# Altium PCB PCB_test_2026-06-06.pcbdoc
Units mm, origin at the board's own origin, x right, y up, seen from the top; angles counter-clockwise.
Board outline 102.65 x 77.65 mm, 2 copper layers (Top Layer, Bottom Layer); 1 components, 5 nets, 2 pads, 0 vias.
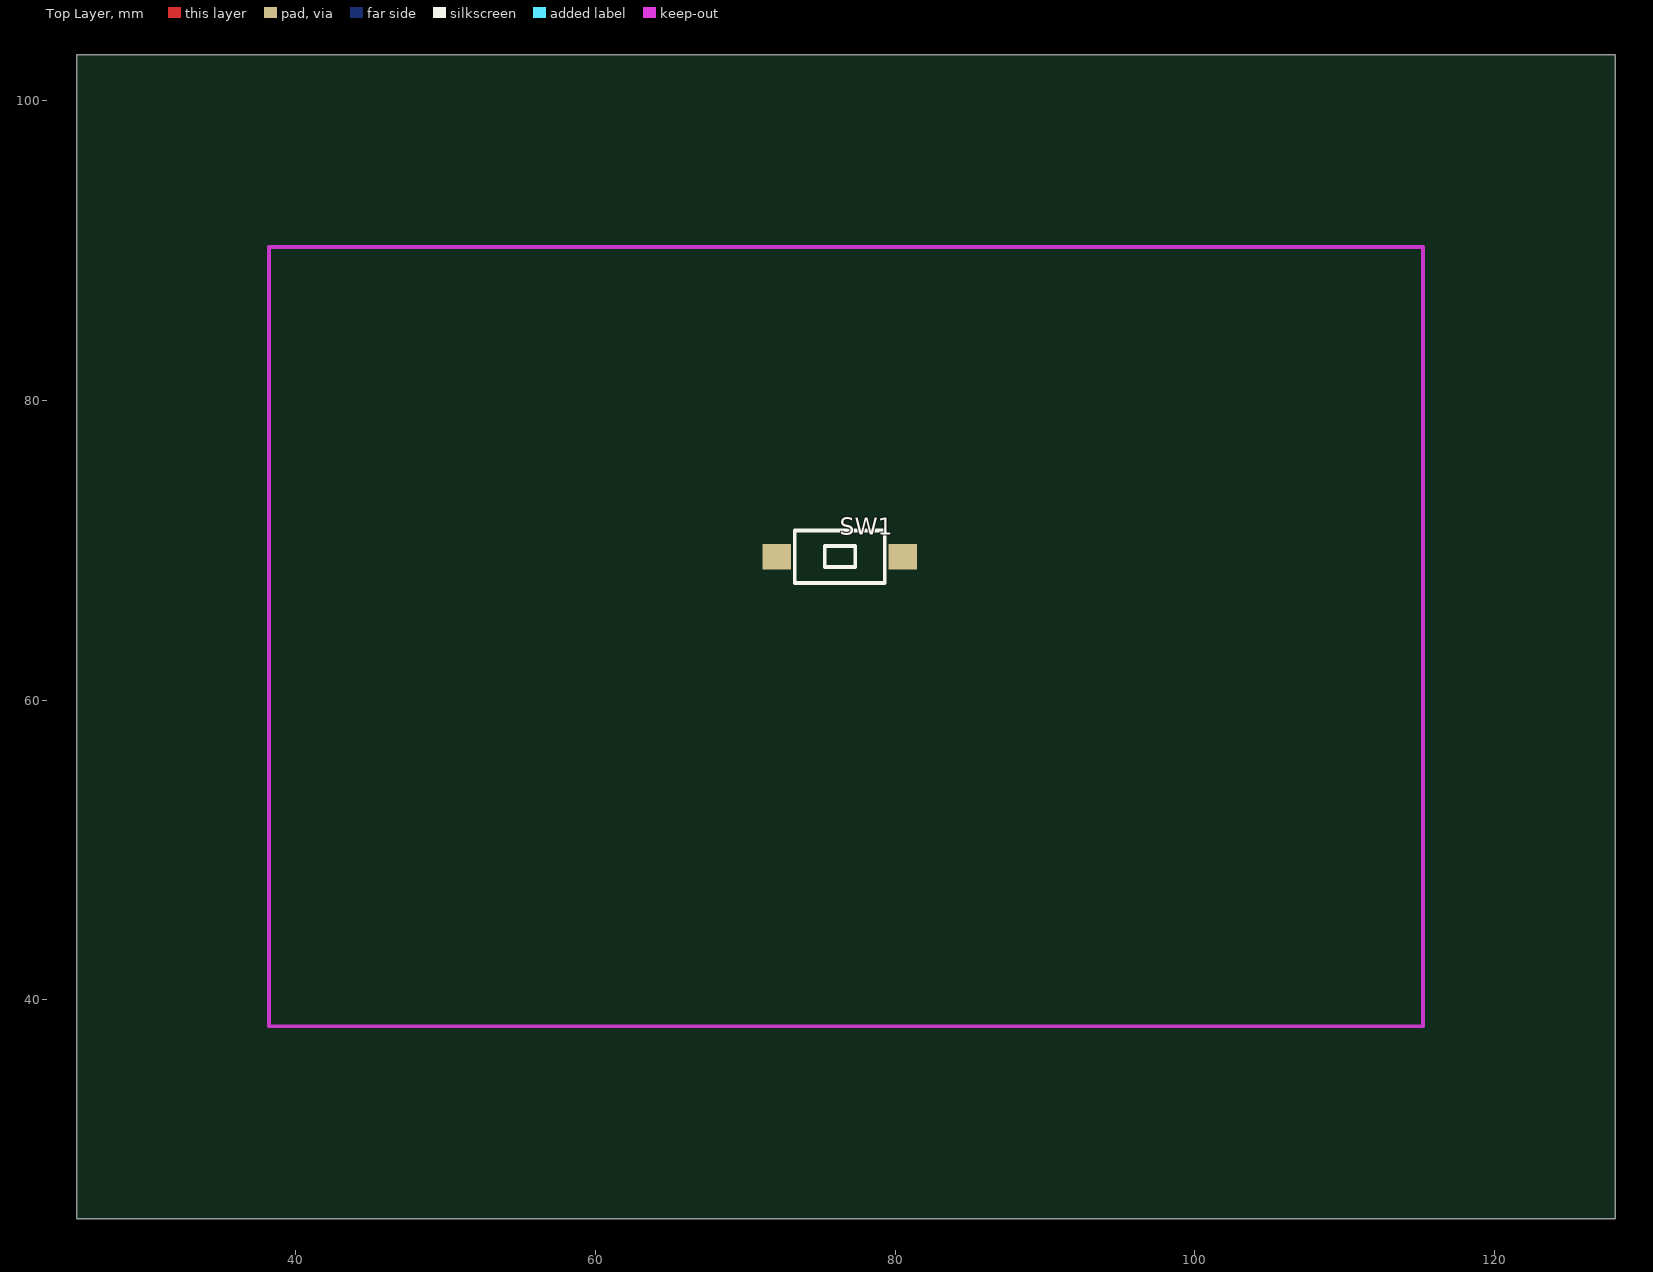
[diagram p0: Top Layer view]
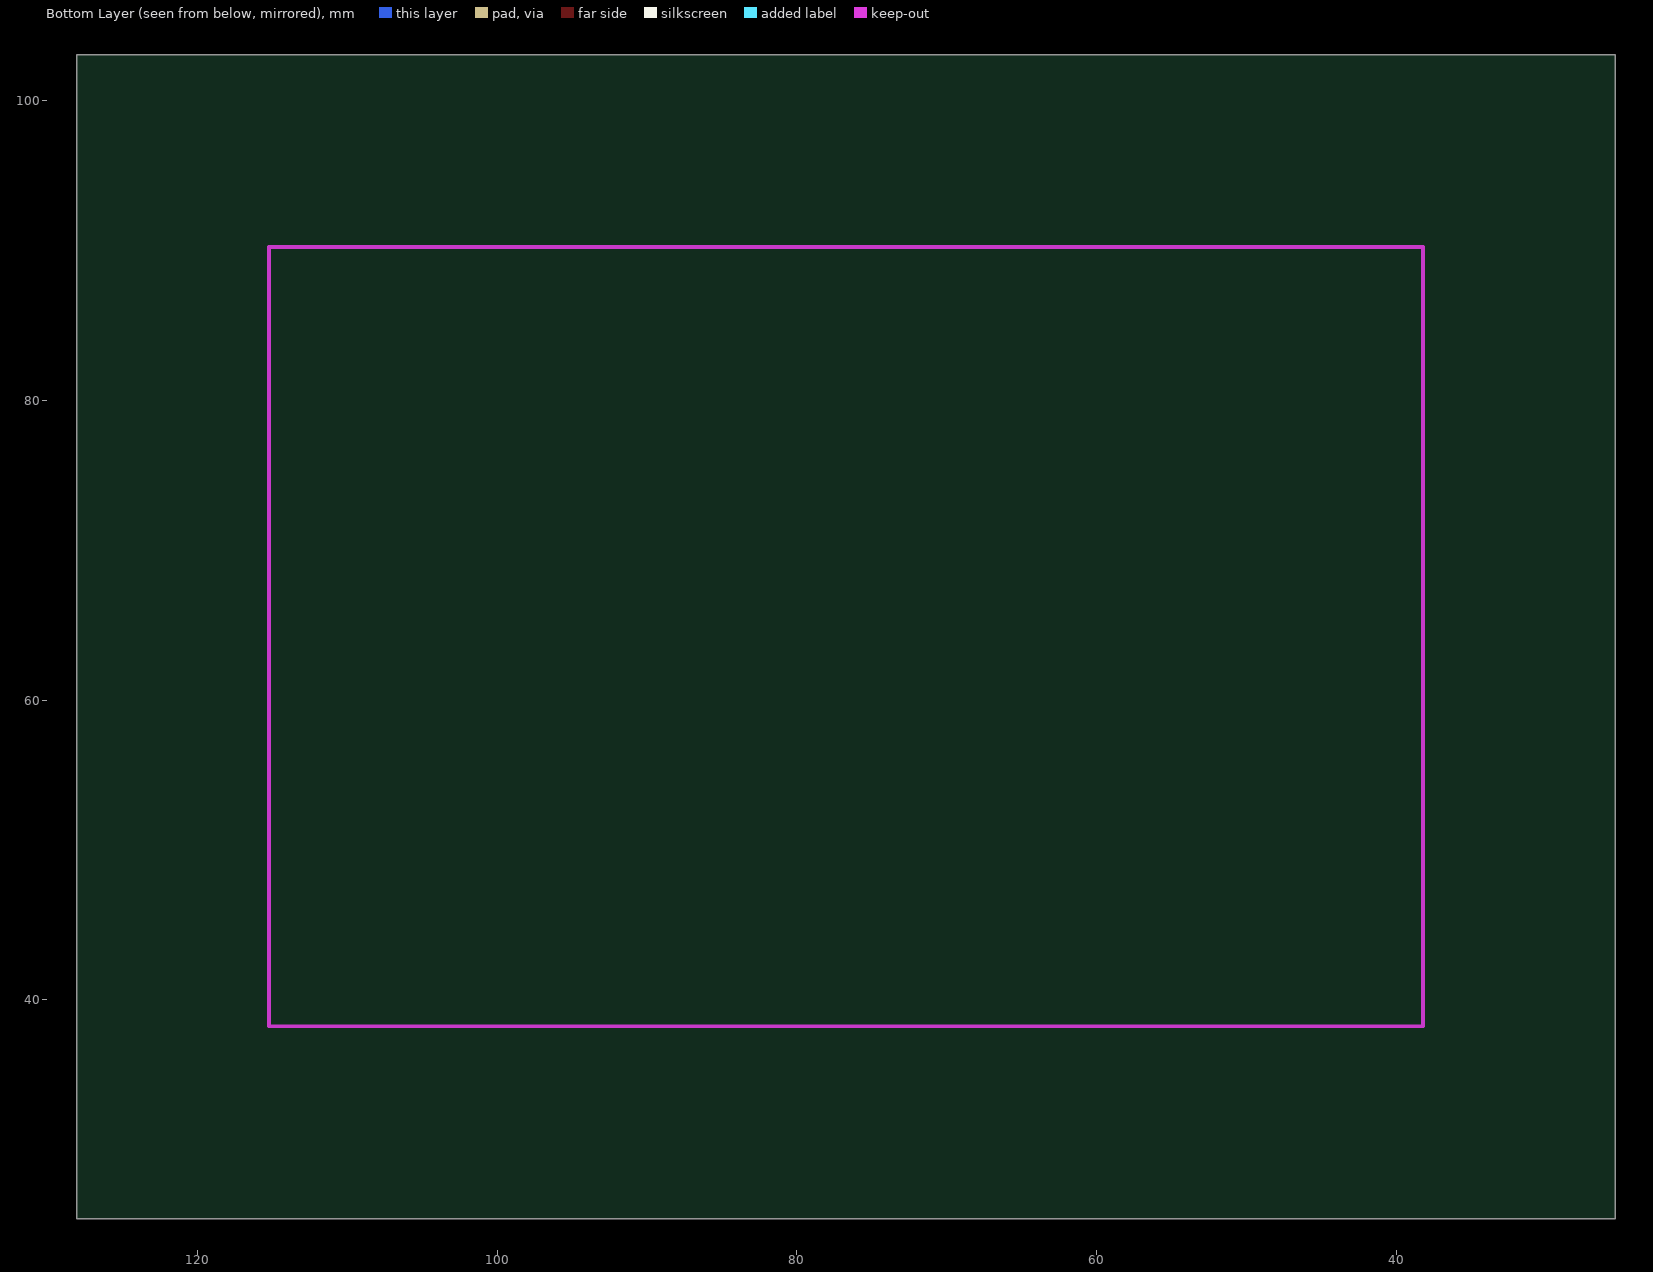
[diagram p1: Bottom Layer view, seen from below]

## Layer stack, top to bottom
Top Layer: signal copper (thickness not stored)
Dielectric: dielectric 0.32, FR-4, Dk 4.8
Bottom Layer: signal copper (thickness not stored)

## Board outline
128.054,25.4 25.4,25.4 25.4,103.054 128.054,103.054

## Components (designator, comment, footprint, x,y, rotation, side; value= is the part's Value field where it differs from the comment)
SW1 "SMD TACTILE SWITCH 3X6X2.5MM" SW-SMD_L6.0-W3.5-LS8.0 76.312,69.565 r0 top

## Footprints (in the part's own frame and the unit in brackets; to place one, negate y for a bottom-side part, rotate by r counter-clockwise, add the part's x,y. Pads: shape width x height; smd on the part's side, far side on the other; paste and mask are expansions set on the pad)
SW-SMD_L6.0-W3.5-LS8.0 [mm]
  rect 1.9x1.7 smd paste+0 mask+0.102: 1(-4.2,0) 2(4.2,0)
  silkscreen extent -3,-1.75 3,1.75

## Nets (pads, with @x,y where several pads share a name; then routed paths per layer and width w, separated by ;. In a path a pad name is that pad's centre, name@x,y a point inside that pad or via, vN(x,y) a via of type N, cw(c..) or ccw(c..) an arc to the next point about the centre after c; other vN are vias at no path point)
S$21: 
S$23: 
S$27: 
SW1_1: SW1.1
SW1_2: SW1.2

## Silkscreen, mask and mechanical layers (free items; w line width, h text height)
Document:
  lines w0.003: 76.727,64.227 76.727,64.227